# EAGLE board XMICRO-MEMORY (EAGLE 6.3)
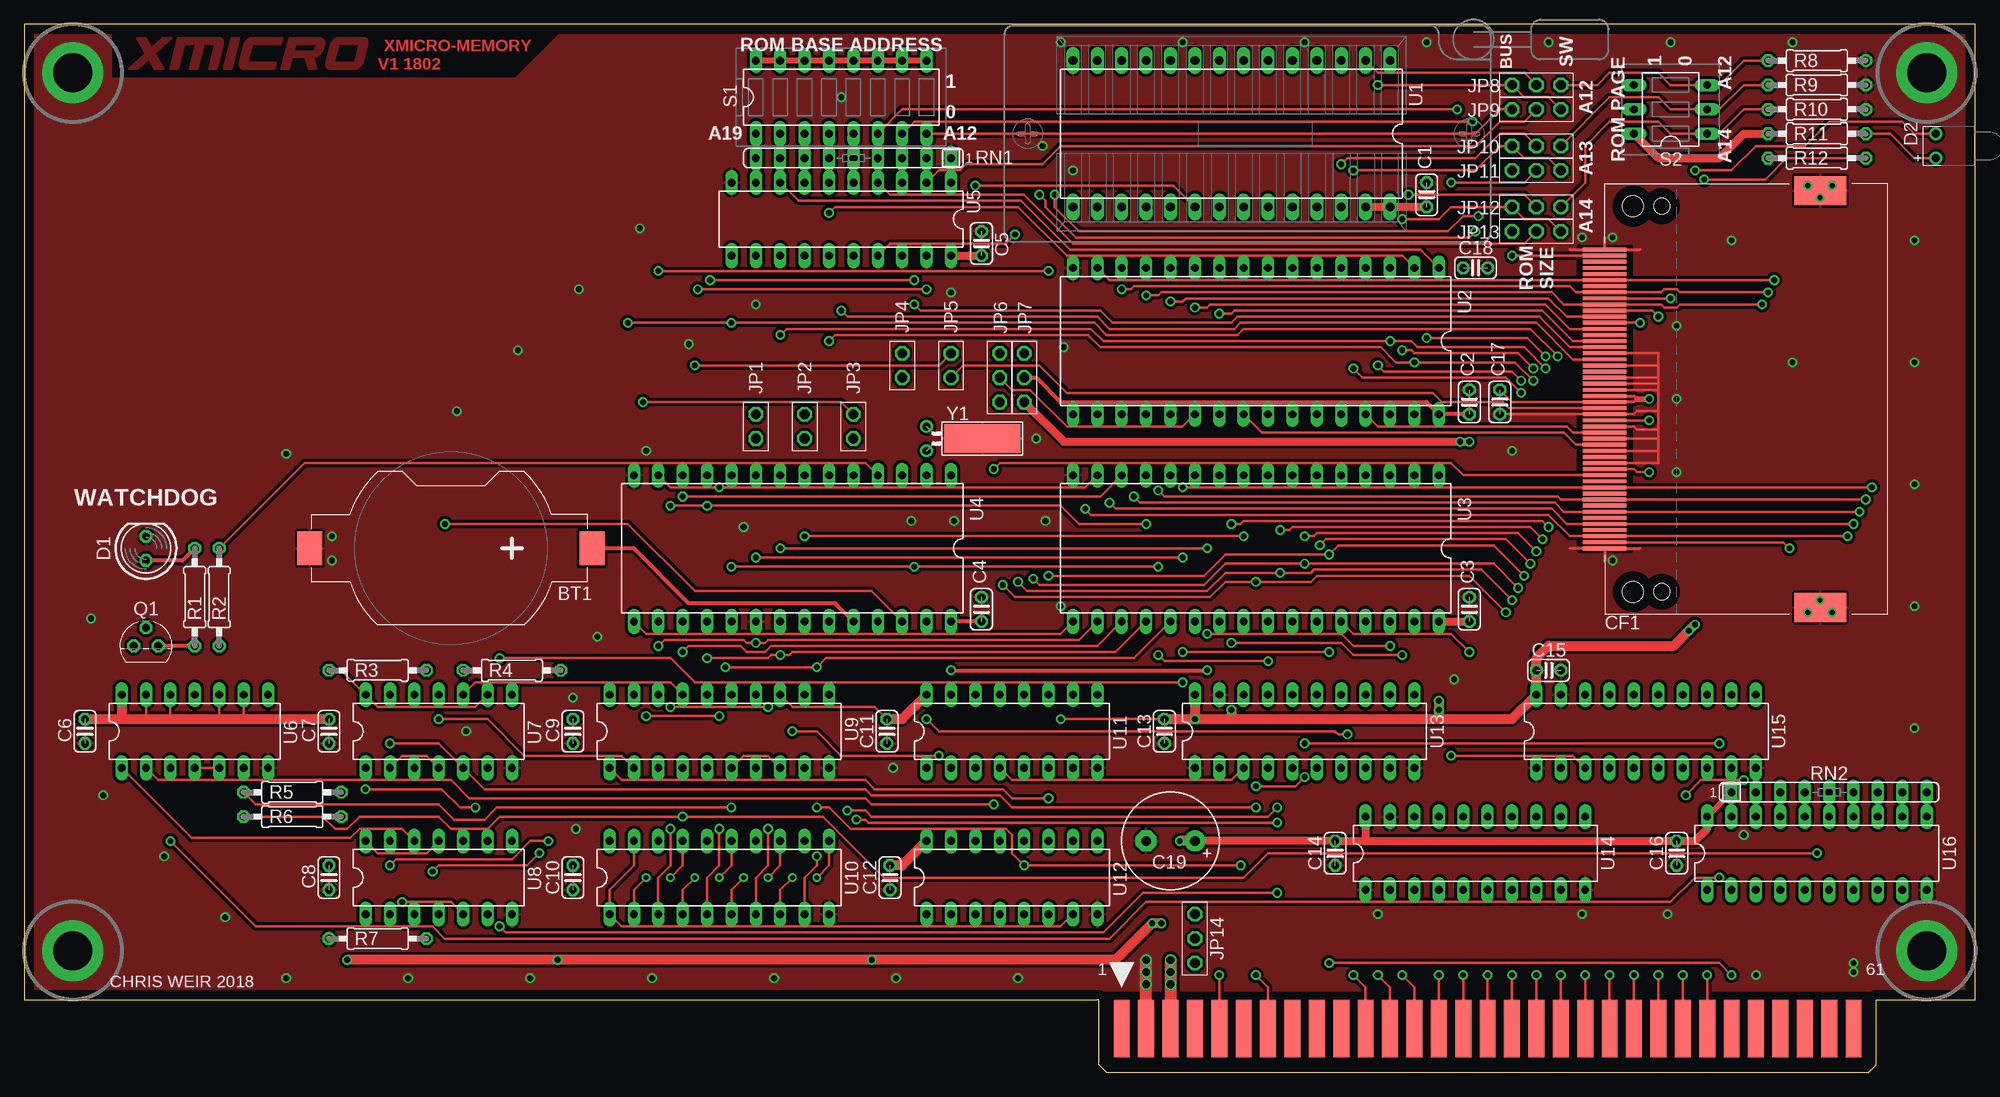
[diagram p0: board, top side]
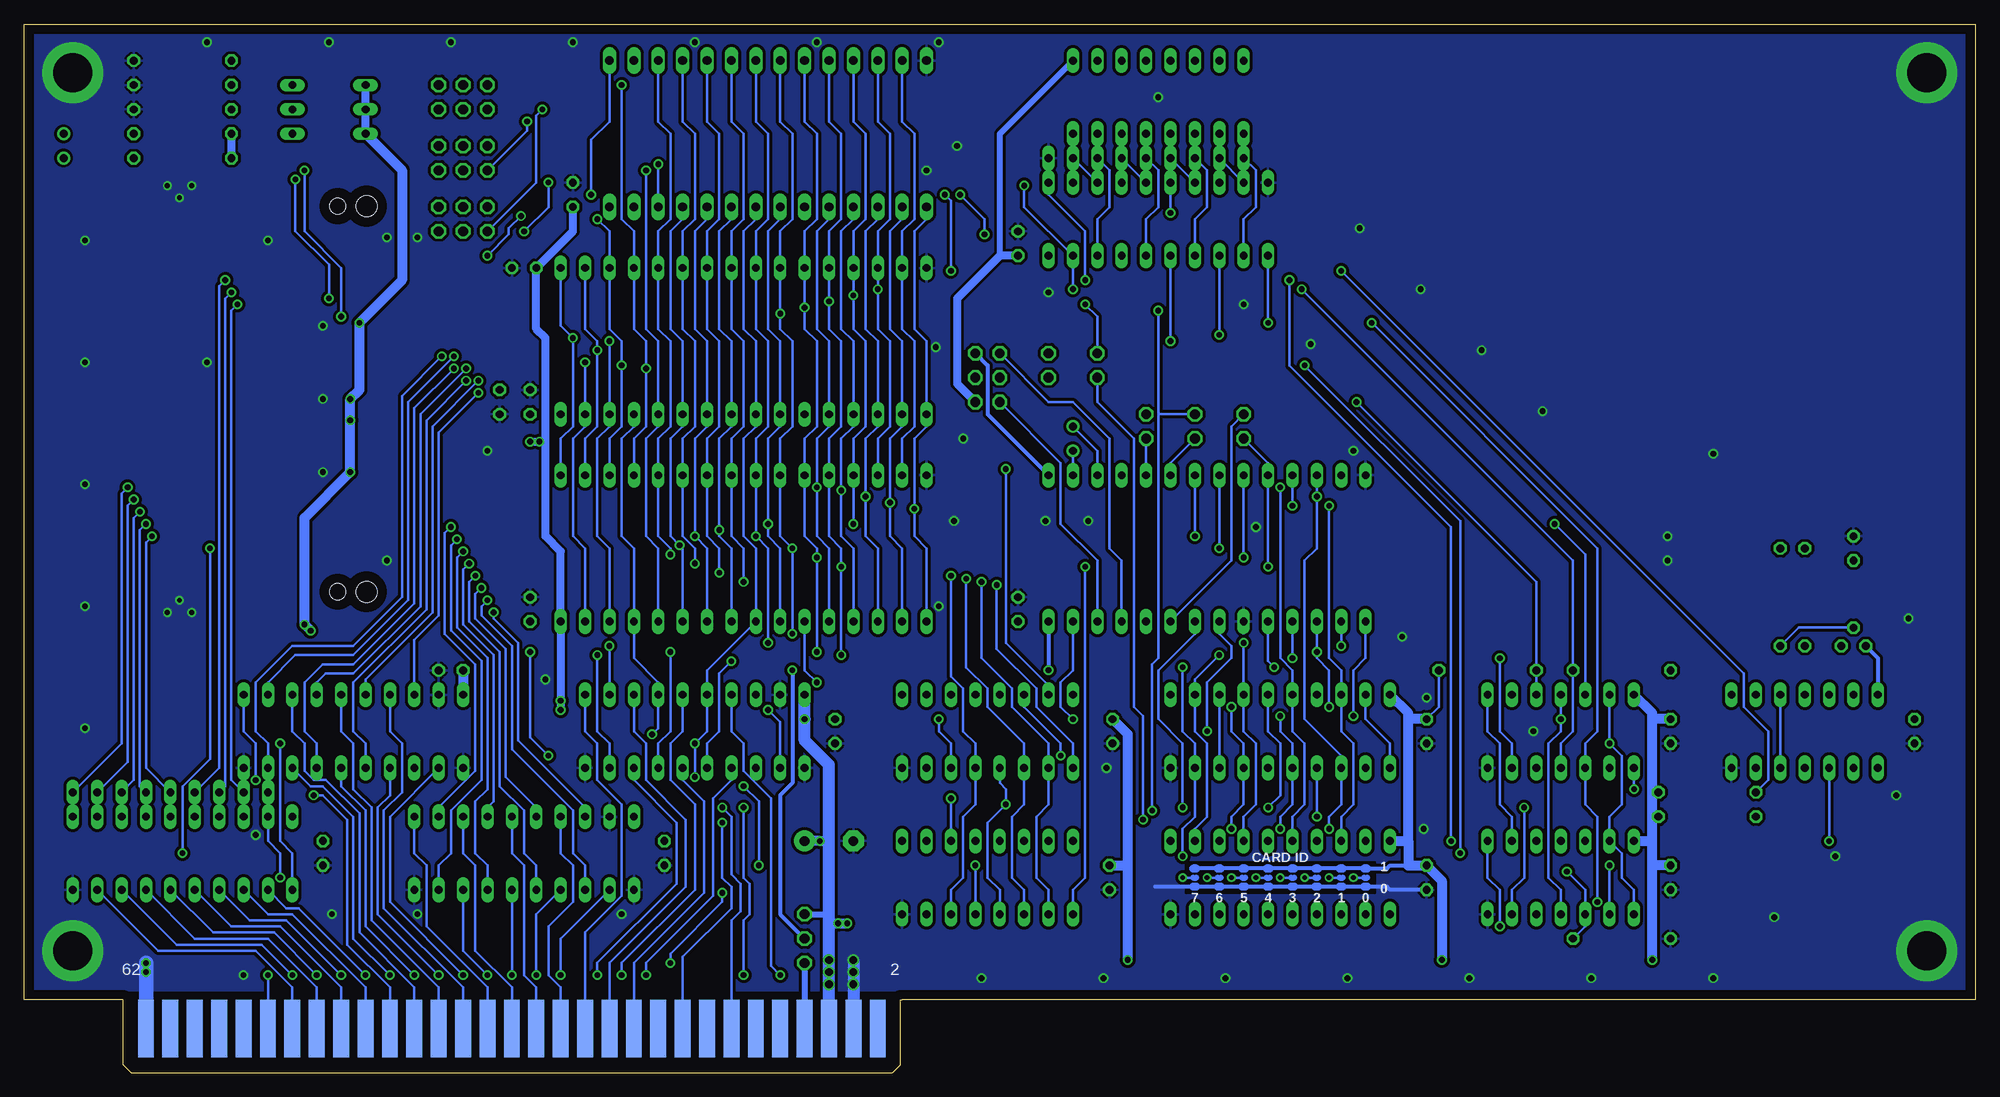
[diagram p1: board, bottom side, seen from below]

Size 203.2 x 109.22 mm. Coordinates in mm from the lower left corner, seen from the top.
Outline: 111.76,7.62 0,7.62 0,109.22 203.2,109.22 203.2,7.62 193.04,7.62
Copper layers (1*16): Top 0.035mm / dielectric 1.5mm / Bottom 0.035mm
Design rules "default *": minimum track width 10mil, minimum drill 0.3mm, track to track 8mil, track to pad 8mil, pad to pad 8mil, via to via 8mil, smd to smd 8mil, copper to edge 40mil, drill to drill 10mil, minimum pad ring 10mil, minimum via ring 8mil, stop-mask expansion 3mil, vias tented up to drill 30mil, thermal gap 10mil
Net classes: 1 GND: width 0.254 mm, clearance 0.305 mm
tRestrict: area 161.9,54.3 to 167.3,86; 2 lines
bRestrict: area 62.5,18.7 to 82.2,21.9

## Footprints (pad centres in the part's own frame; a part is rotated, then mirrored left to right if it is on the bottom)
SMTU2032 = smd 2.6 x 3.5: + -14.7,0; - 14.7,0
C025-024X044 = drill 0.813 octagon: 1 -1.27,0; 2 1.27,0
C-10-5 = drill 1.016 pad 2.184: + -2.54,0 | drill 1.016 pad 2.184 octagon: - 2.54,0
EDGE62M = smd 1.651 x 5.969: 1 -38.1,-3.01; 3 -35.56,-3.01; 5 -33.02,-3.01; 7 -30.48,-3.01; 9 -27.94,-3.01; 11 -25.4,-3.01; 13 -22.86,-3.01; 15 -20.32,-3.01; 17 -17.78,-3.01; 19 -15.24,-3.01; 21 -12.7,-3.01; 23 -10.16,-3.01; 25 -7.62,-3.01; 27 -5.08,-3.01; 29 -2.54,-3.01; 31 0,-3.01; 33 2.54,-3.01; 35 5.08,-3.01; 37 7.62,-3.01; 39 10.16,-3.01; 41 12.7,-3.01; 43 15.24,-3.01; 45 17.78,-3.01; 47 20.32,-3.01; 49 22.86,-3.01; 51 25.4,-3.01; 53 27.94,-3.01; 55 30.48,-3.01; 57 33.02,-3.01; 59 35.56,-3.01; 61 38.1,-3.01 | smd 1.651 x 5.969 bottom: 2 -38.1,-3.01; 4 -35.56,-3.01; 6 -33.02,-3.01; 8 -30.48,-3.01; 10 -27.94,-3.01; 12 -25.4,-3.01; 14 -22.86,-3.01; 16 -20.32,-3.01; 18 -17.78,-3.01; 20 -15.24,-3.01; 22 -12.7,-3.01; 24 -10.16,-3.01; 26 -7.62,-3.01; 28 -5.08,-3.01; 30 -2.54,-3.01; 32 0,-3.01; 34 2.54,-3.01; 36 5.08,-3.01; 38 7.62,-3.01; 40 10.16,-3.01; 42 12.7,-3.01; 44 15.24,-3.01; 46 17.78,-3.01; 48 20.32,-3.01; 50 22.86,-3.01; 52 25.4,-3.01; 54 27.94,-3.01; 56 30.48,-3.01; 58 33.02,-3.01; 60 35.56,-3.01; 62 38.1,-3.01
CF-KYOCERA = smd 0.4 x 4.5: 1 -15.557,7.5; 2 -14.287,7.5; 3 -13.018,7.5; 4 -11.748,7.5; 5 -10.477,7.5; 6 -9.207,7.5; 7 -7.938,7.5; 8 -6.668,7.5; 9 -5.397,7.5; 10 -4.128,7.5; 11 -2.857,7.5; 12 -1.587,7.5; 13 -0.318,7.5; 14 0.953,7.5; 15 2.223,7.5; 16 3.493,7.5; 17 4.763,7.5; 18 6.032,7.5; 19 7.303,7.5; 20 8.572,7.5; 21 9.842,7.5; 22 11.113,7.5; 23 12.383,7.5; 24 13.652,7.5; 25 14.922,7.5; 26 -14.922,7.5; 27 -13.652,7.5; 28 -12.383,7.5; 29 -11.113,7.5; 30 -9.842,7.5; 31 -8.572,7.5; 32 -7.303,7.5; 33 -6.032,7.5; 34 -4.763,7.5; 35 -3.493,7.5; 36 -2.223,7.5; 37 -0.953,7.5; 38 0.318,7.5; 39 1.587,7.5; 40 2.857,7.5; 41 4.128,7.5; 42 5.397,7.5; 43 6.668,7.5; 44 7.938,7.5; 45 9.207,7.5; 46 10.477,7.5; 47 11.748,7.5; 48 13.018,7.5; 49 14.287,7.5; 50 15.557,7.5 | smd 3 x 5.4: P$51 -21.71,-14.95; P$52 21.71,-14.95 | hole 2.2: -20.08,4.55; 20.08,4.55 | hole 1.7: -20.08,1.55; 20.08,1.55
LED5MM = drill 0.813 octagon: A -1.27,0; K 1.27,0
LED-3-R = drill 0.813: A 1.27,0; C -1.27,0
1X02 = drill 1.016 octagon: 1 -1.27,0; 2 1.27,0
1X03 = drill 1.016 octagon: 1 -2.54,0; 2 0,0; 3 2.54,0
TO92 = drill 0.813 octagon: 1 -1.27,0; 2 0,1.905; 3 1.27,0
0207/10 = drill 0.813 octagon: 1 -5.08,0; 2 5.08,0
SIL9 = drill 0.813 long: 1 -10.16,0; 2 -7.62,0; 3 -5.08,0; 4 -2.54,0; 5 0,0; 6 2.54,0; 7 5.08,0; 8 7.62,0; 9 10.16,0
SW-DIP8 = drill 0.813 long: 1 -8.89,-3.81; 2 -6.35,-3.81; 3 -3.81,-3.81; 4 -1.27,-3.81; 5 1.27,-3.81; 6 3.81,-3.81; 7 6.35,-3.81; 8 8.89,-3.81; 9 8.89,3.81; 10 6.35,3.81; 11 3.81,3.81; 12 1.27,3.81; 13 -1.27,3.81; 14 -3.81,3.81; 15 -6.35,3.81; 16 -8.89,3.81
SW-DIP3 = drill 0.813 long: 1 -2.54,-3.81; 2 0,-3.81; 3 2.54,-3.81; 4 2.54,3.81; 5 0,3.81; 6 -2.54,3.81
228-1277-00 = drill 0.9 long: 1 -16.51,-7.62; 2 -13.97,-7.62; 3 -11.43,-7.62; 4 -8.89,-7.62; 5 -6.35,-7.62; 6 -3.81,-7.62; 7 -1.27,-7.62; 8 1.27,-7.62; 9 3.81,-7.62; 10 6.35,-7.62; 11 8.89,-7.62; 12 11.43,-7.62; 13 13.97,-7.62; 14 16.51,-7.62; 15 16.51,7.62; 16 13.97,7.62; 17 11.43,7.62; 18 8.89,7.62; 19 6.35,7.62; 20 3.81,7.62; 21 1.27,7.62; 22 -1.27,7.62; 23 -3.81,7.62; 24 -6.35,7.62; 25 -8.89,7.62; 26 -11.43,7.62; 27 -13.97,7.62; 28 -16.51,7.62
DIL32-6 = drill 0.813 long: 1 -19.05,-7.62; 2 -16.51,-7.62; 3 -13.97,-7.62; 4 -11.43,-7.62; 5 -8.89,-7.62; 6 -6.35,-7.62; 7 -3.81,-7.62; 8 -1.27,-7.62; 9 1.27,-7.62; 10 3.81,-7.62; 11 6.35,-7.62; 12 8.89,-7.62; 13 11.43,-7.62; 14 13.97,-7.62; 15 16.51,-7.62; 16 19.05,-7.62; 17 19.05,7.62; 18 16.51,7.62; 19 13.97,7.62; 20 11.43,7.62; 21 8.89,7.62; 22 6.35,7.62; 23 3.81,7.62; 24 1.27,7.62; 25 -1.27,7.62; 26 -3.81,7.62; 27 -6.35,7.62; 28 -8.89,7.62; 29 -11.43,7.62; 30 -13.97,7.62; 31 -16.51,7.62; 32 -19.05,7.62
DIL28 = drill 0.813 long: 1 -16.51,-7.62; 2 -13.97,-7.62; 3 -11.43,-7.62; 4 -8.89,-7.62; 5 -6.35,-7.62; 6 -3.81,-7.62; 7 -1.27,-7.62; 8 1.27,-7.62; 9 3.81,-7.62; 10 6.35,-7.62; 11 8.89,-7.62; 12 11.43,-7.62; 13 13.97,-7.62; 14 16.51,-7.62; 15 16.51,7.62; 16 13.97,7.62; 17 11.43,7.62; 18 8.89,7.62; 19 6.35,7.62; 20 3.81,7.62; 21 1.27,7.62; 22 -1.27,7.62; 23 -3.81,7.62; 24 -6.35,7.62; 25 -8.89,7.62; 26 -11.43,7.62; 27 -13.97,7.62; 28 -16.51,7.62
DIL20 = drill 0.813 long: 1 -11.43,-3.81; 2 -8.89,-3.81; 3 -6.35,-3.81; 4 -3.81,-3.81; 5 -1.27,-3.81; 6 1.27,-3.81; 7 3.81,-3.81; 8 6.35,-3.81; 9 8.89,-3.81; 10 11.43,-3.81; 11 11.43,3.81; 12 8.89,3.81; 13 6.35,3.81; 14 3.81,3.81; 15 1.27,3.81; 16 -1.27,3.81; 17 -3.81,3.81; 18 -6.35,3.81; 19 -8.89,3.81; 20 -11.43,3.81
DIL14 = drill 0.813 long: 1 -7.62,-3.81; 2 -5.08,-3.81; 3 -2.54,-3.81; 4 0,-3.81; 5 2.54,-3.81; 6 5.08,-3.81; 7 7.62,-3.81; 8 7.62,3.81; 9 5.08,3.81; 10 2.54,3.81; 11 0,3.81; 12 -2.54,3.81; 13 -5.08,3.81; 14 -7.62,3.81
DIL16 = drill 0.813 long: 1 -8.89,-3.81; 2 -6.35,-3.81; 3 -3.81,-3.81; 4 -1.27,-3.81; 5 1.27,-3.81; 6 3.81,-3.81; 7 6.35,-3.81; 8 8.89,-3.81; 9 8.89,3.81; 10 6.35,3.81; 11 3.81,3.81; 12 1.27,3.81; 13 -1.27,3.81; 14 -3.81,3.81; 15 -6.35,3.81; 16 -8.89,3.81
CRYSTAL-3X8H = drill 0.813: 1 -1.27,0; 2 1.27,0 | smd 3 x 8: P$1 0,5.8

## Placement (x,y rotation side)
BT1  CR2032  [SMTU2032]  44.45,54.61 180 top
C1  0.1uF  [C025-024X044]  146.05,91.44 90 top
C2  0.1uF  [C025-024X044]  150.5,69.85 90 top
C3  0.1uF  [C025-024X044]  150.5,48.26 90 top
C4  0.1uF  [C025-024X044]  99.69,48.26 90 top
C5  0.1uF  [C025-024X044]  99.69,86.36 90 top
C6  0.1uF  [C025-024X044]  6.35,35.56 270 top
C7  0.1uF  [C025-024X044]  31.75,35.56 270 top
C8  0.1uF  [C025-024X044]  31.75,20.32 270 top
C9  0.1uF  [C025-024X044]  57.15,35.56 270 top
C10  0.1uF  [C025-024X044]  57.15,20.32 270 top
C11  0.1uF  [C025-024X044]  89.85,35.56 270 top
C12  0.1uF  [C025-024X044]  90.17,20.32 270 top
C13  0.1uF  [C025-024X044]  118.75,35.56 270 top
C14  0.1uF  [C025-024X044]  136.53,22.86 270 top
C15  0.1uF  [C025-024X044]  158.75,41.91 0 top
C16  0.1uF  [C025-024X044]  172.09,22.86 270 top
C17  0.1uF  [C025-024X044]  153.67,69.85 270 top
C18  0.1uF  [C025-024X044]  151.13,83.82 0 top
C19  220uF 10V  [C-10-5]  119.38,24.13 180 top
CE0  XMICRO-BUS-EDGE62M  [EDGE62M]  152.4,7.62 0 top
CF1  CF-IDE  [CF-KYOCERA]  172.09,70.17 90 top
D1  RED  [LED5MM]  12.7,54.61 90 top
D2  GREEN  [LED-3-R]  199.07,96.52 270 top
JP1  PINHD-1X2THRU  [1X02]  76.2,67.31 90 top
JP2  PINHD-1X2THRU  [1X02]  81.28,67.31 90 top
JP3  PINHD-1X2THRU  [1X02]  86.36,67.31 90 top
JP4  PINHD-1X2THRU  [1X02]  91.44,73.66 90 top
JP5  PINHD-1X2THRU  [1X02]  96.52,73.66 90 top
JP6  PINHD1X3THRU  [1X03]  101.6,72.39 90 top
JP7  PINHD1X3THRU  [1X03]  104.14,72.39 90 top
JP8  PINHD1X3THRU  [1X03]  157.48,102.87 180 top
JP9  PINHD1X3THRU  [1X03]  157.48,100.33 180 top
JP10  PINHD1X3THRU  [1X03]  157.48,96.52 180 top
JP11  PINHD1X3THRU  [1X03]  157.48,93.98 180 top
JP12  PINHD1X3THRU  [1X03]  157.48,90.17 180 top
JP13  PINHD1X3THRU  [1X03]  157.48,87.63 180 top
JP14  PINHD1X3THRU  [1X03]  121.92,13.97 90 top
Q1  2N4403  [TO92]  12.7,44.45 0 top
R1  270  [0207/10]  17.78,49.53 270 top
R2  22k  [0207/10]  20.32,49.53 270 top
R3  10k  [0207/10]  36.83,41.91 0 top
R4  10k  [0207/10]  50.8,41.91 0 top
R5  10k  [0207/10]  27.94,29.21 180 top
R6  10k  [0207/10]  27.94,26.67 180 top
R7  10k  [0207/10]  36.83,13.97 0 top
R8  10k  [0207/10]  186.69,105.41 180 top
R9  10k  [0207/10]  186.69,102.87 180 top
R10  10k  [0207/10]  186.69,100.33 180 top
R11  270  [0207/10]  186.69,97.79 180 top
R12  10k  [0207/10]  186.69,95.25 180 top
RN1  10k  [SIL9]  86.36,95.25 180 top
RN2  10k  [SIL9]  187.96,29.21 0 top
S1  SW-DIP08  [SW-DIP8]  85.09,101.6 0 top
S2  SW-DIP03  [SW-DIP3]  171.45,100.33 90 top
U1  28C256  [228-1277-00]  125.73,97.79 180 top
U2  AS6C4008  [DIL32-6]  128.27,76.2 180 top
U3  AS6C4008  [DIL32-6]  128.27,54.61 180 top
U4  BQ4845  [DIL28]  80.01,54.61 180 top
U5  74688  [DIL20]  85.09,88.9 180 top
U6  7408  [DIL14]  17.78,35.56 0 top
U7  7410  [DIL14]  43.18,35.56 0 top
U8  7404  [DIL14]  43.18,20.32 0 top
U9  74244  [DIL20]  72.39,35.56 0 top
U10  74244  [DIL20]  72.39,20.32 0 top
U11  74138  [DIL16]  102.87,35.56 0 top
U12  74138  [DIL16]  102.87,20.32 0 top
U13  74244  [DIL20]  133.35,35.56 0 top
U14  74244  [DIL20]  151.13,22.86 0 top
U15  74244  [DIL20]  168.91,35.56 0 top
U16  74245  [DIL20]  186.69,22.86 0 top
Y1  32.768kHz  [CRYSTAL-3X8H]  93.98,66.04 270 top

## Library data of the parts
BT1 C19 CE0 CF1 D2 JP1-JP14 Q1 S1 S2 U1-U4 Y1 = Custom
C1-C18 R1-R12 = resistor
D1 = led
RN1 RN2 = resistor-sil; OC_FARNELL: unknown; OC_NEWARK: unknown
U5-U16 = 74xx-us

## Nets
!BCSX: CE0.9 U13.17
!BRD: CE0.21 U13.4
!BWR: CE0.22 U13.6
!CESB!IN: JP6.1 U4.26 U7.12
!CESB!OUT: JP6.3 U4.25
!CF_CD1: CF1.26 R6.2 U9.4
!CF_CD2: CF1.25 R5.2 U9.15
!CINH: CE0.13 U7.5 U7.13 U8.1 U8.13
!CS_CF: CF1.7 U11.15
!CS_ID: U10.1 U10.19 U12.7
!CS_RTC: U4.21 U11.14
!CS_SR: U9.1 U9.19 U12.11
!CSX: U6.2 U11.4 U12.4 U13.3
!INT_RTC: JP3.1 U4.5
!IRQX: CE0.52 U8.8
!RD: CF1.34 U1.22 U2.24 U3.24 U4.22 U12.5 U13.16 U16.1
!RST: CE0.14 CF1.41 JP2.2
!SR_CF: U7.11 U8.4 U9.2
!SR_RTC: JP3.2 R4.1 U7.10 U9.17
!U1CS: JP6.2 U2.22
!U2CS: U3.22 U7.6
!U3CS: R3.2 U1.20 U5.19 U7.2 U7.4
!WAIT: CE0.18 JP4.1
!WR: CF1.35 U2.29 U3.29 U4.27 U13.14
+5VSB: CE0.8 JP14.1
A0: CF1.20 JP1.1 U1.10 U2.12 U3.12 U4.10 U12.1 U13.5
A1: CF1.19 U1.9 U2.11 U3.11 U4.9 U13.7
A2: CF1.18 U1.8 U2.10 U3.10 U4.8 U13.12
A3: U1.7 U2.9 U3.9 U4.7 U13.9
A4: U1.6 U2.8 U3.8 U11.1 U14.18
A5: U1.5 U2.7 U3.7 U11.2 U12.2 U14.3
A6: U1.4 U2.6 U3.6 U11.3 U12.3 U14.16
A7: U1.3 U2.5 U3.5 U11.5 U12.6 U14.5
A8: U1.25 U2.27 U3.27 U14.14
A9: U1.24 U2.26 U3.26 U14.7
A10: U1.21 U2.23 U3.23 U14.12
A11: U1.23 U2.25 U3.25 U14.9
A12: JP8.3 JP9.1 U2.4 U3.4 U15.18
A13: JP10.3 JP11.1 U2.28 U3.28 U15.3
A14: JP12.3 JP13.1 U2.3 U3.3 U15.16
A15: U2.31 U3.31 U5.15 U15.5
A16: U2.2 U3.2 U5.6 U15.14
A17: U2.30 U3.30 U5.13 U15.7
A18: U2.1 U3.1 U5.8 U15.12
A19: U5.11 U7.3 U8.5 U15.9
BA0: CE0.23 U13.15
BA1: CE0.24 U13.13
BA2: CE0.25 U13.8
BA3: CE0.26 U13.11
BA4: CE0.27 U14.2
BA5: CE0.28 U14.17
BA6: CE0.29 U14.4
BA7: CE0.30 U14.15
BA8: CE0.31 U14.6
BA9: CE0.32 U14.13
BA10: CE0.33 U14.8
BA11: CE0.34 U14.11
BA12: CE0.35 U15.2
BA13: CE0.36 U15.17
BA14: CE0.37 U15.4
BA15: CE0.38 U15.15
BA16: CE0.39 U15.6
BA17: CE0.40 U15.13
BA18: CE0.41 U15.8
BA19: CE0.42 U15.11
D0: CF1.21 RN2.2 U1.11 U2.13 U3.13 U4.11 U9.18 U10.18 U16.18
D1: CF1.22 RN2.3 U1.12 U2.14 U3.14 U4.12 U9.3 U10.3 U16.17
D2: CF1.23 RN2.4 U1.13 U2.15 U3.15 U4.13 U9.16 U10.16 U16.16
D3: CF1.2 RN2.5 U1.15 U2.17 U3.17 U4.15 U9.5 U10.5 U16.15
D4: CF1.3 RN2.6 U1.16 U2.18 U3.18 U4.16 U9.14 U10.14 U16.14
D5: CF1.4 RN2.7 U1.17 U2.19 U3.19 U4.17 U9.7 U10.7 U16.13
D6: CF1.5 RN2.8 U1.18 U2.20 U3.20 U4.18 U9.12 U10.12 U16.12
D7: CF1.6 RN2.9 U1.19 U2.21 U3.21 U4.19 U9.9 U10.9 U16.11
GND [GND]: BT1.- C1.2 C2.2 C3.2 C4.2 C5.2 C6.2 C7.2 C8.2 C9.2 C10.2 C11.2 C12.2 C13.2 C14.2 C15.2 C16.2 C17.2 C18.2 C19.- CE0.3 CE0.4 CE0.62 CF1.1 CF1.8 CF1.9 CF1.10 CF1.11 CF1.12 CF1.14 CF1.15 CF1.16 CF1.17 CF1.39 CF1.50 CF1.P$51 CF1.P$52 D1.K R7.1 R8.1 R9.1 R10.1 RN1.1 U1.14 U2.16 U3.16 U4.14 U4.20 U5.10 U6.7 U7.7 U8.7 U9.10 U10.10 U11.8 U12.8 U13.1 U13.10 U13.19 U14.1 U14.10 U14.19 U15.1 U15.10 U15.19 U16.10 Y1.P$1
ID0: U10.2
ID1: U10.17
ID2: U10.4
ID3: U10.15
ID4: U10.6
ID5: U10.13
ID6: U10.8
ID7: U10.11
INT_CF: CF1.37 JP5.1
N$1: CF1.45 D2.C
N$2: D2.A R11.1
N$3: CF1.42 JP4.2
N$4: U5.1 U8.2
N$5: U4.3 Y1.1
N$6: U4.2 Y1.2
N$7: BT1.+ U4.24
N$8: Q1.2 R2.2
N$9: C2.1 JP7.2 U2.32
N$10: Q1.3 R1.2
N$11: JP1.2 U4.23
N$12: JP10.2 U1.26
N$13: D1.A R1.1
N$14: R2.1 U4.4
N$16: JP8.2 U1.2
N$17: JP12.2 U1.1
N$18: JP13.2 U5.4
N$19: U7.8 U8.9
N$20: U6.1 U8.12
N$21: JP5.2 R7.2 U8.3
N$22: JP11.2 U5.17
N$23: JP9.2 U5.2
N$24: C4.1 JP14.2 U4.28
N$25: CF1.46 R12.1
N$27: U7.1 U8.6
N$31: JP2.1 U4.6
N$32: U6.3 U16.19
N$33: CE0.50 U16.9
N$34: CE0.49 U16.8
N$35: CE0.48 U16.7
N$36: CE0.47 U16.6
N$37: CE0.46 U16.5
N$38: CE0.45 U16.4
N$39: CE0.44 U16.3
N$40: CE0.43 U16.2
N$108: JP8.1 R8.2 S2.3
N$109: JP10.1 R9.2 S2.2
N$110: JP12.1 R10.2 S2.1
SW12: JP9.3 RN1.2 S1.8 U5.3
SW13: JP11.3 RN1.3 S1.7 U5.18
SW14: JP13.3 RN1.4 S1.6 U5.5
SW15: RN1.5 S1.5 U5.16
SW16: RN1.6 S1.4 U5.7
SW17: RN1.7 S1.3 U5.14
SW18: RN1.8 S1.2 U5.9
SW19: RN1.9 S1.1 U5.12
VBAT: JP7.3 U4.1
VCC: C1.1 C3.1 C5.1 C6.1 C7.1 C8.1 C9.1 C10.1 C11.1 C12.1 C13.1 C14.1 C15.1 C16.1 C17.1 C18.1 C19.+ CE0.5 CE0.6 CF1.13 CF1.32 CF1.36 CF1.38 CF1.44 JP7.1 JP14.3 Q1.1 R3.1 R4.2 R5.1 R6.1 R11.2 R12.2 RN2.1 S1.9 S1.10 S1.11 S1.12 S1.13 S1.14 S1.15 S1.16 S2.4 S2.5 S2.6 U1.27 U1.28 U3.32 U5.20 U6.4 U6.5 U6.9 U6.10 U6.12 U6.13 U6.14 U7.9 U7.14 U8.11 U8.14 U9.6 U9.8 U9.11 U9.13 U9.20 U10.20 U11.6 U11.16 U12.16 U13.2 U13.20 U14.20 U15.20 U16.20

## Tracks (layer width: path | path; a pad name or v marks a point on that pad's centre or on a via)
!BCSX  (via drill 0.6)
  Top 0.254: CE0.9 v124.46,10.16
  Bottom 0.254: v124.46,10.16 125.41,11.11 125.41,28.57 128.27,31.43 128.27,34.29 129.54,35.56 U13.17
!BRD  (via drill 0.6)
  Top 0.254: CE0.21 139.7,8.89 v138.43,10.16
  Bottom 0.254: v138.43,10.16 138.43,11.43 131.44,18.41 131.44,28.57 129.54,30.48 U13.4
!BWR
  Bottom 0.254: CE0.22 139.7,11.43 132.4,18.73 132.4,28.26 134.62,30.48 U13.6
!CESB!IN  (via drill 0.6)
  Top 0.254: v43.81,57.15 62.87,57.15 69.85,50.16 88.27,50.16 U4.26
  Bottom 0.254: JP6.1 95.25,63.5 95.25,57.15 91.44,53.34 U4.26 | U7.12 40.64,53.97 v43.81,57.15
!CESB!OUT
  Bottom 0.254: U4.25 88.9,53.34 90.17,54.61 90.17,66.04 93.98,69.85 96.52,69.85 JP6.3
!CF_CD1  (via drill 0.6)
  Top 0.254: CF1.26 183.2,55.24 v183.83,54.61 | v186.69,22.86 129.54,22.86 127,20.32 89.53,20.32 83.19,26.67 v68.58,26.67 49.53,26.67 48.26,25.4 44.45,25.4 43.18,26.67 34.92,26.67 33.66,25.4 32.38,25.4 31.11,26.67 R6.2
  Bottom 0.254: v183.83,54.61 183.83,32.7 186.69,29.85 v186.69,22.86 | U9.4 v68.58,26.67
!CF_CD2  (via drill 0.6)
  Top 0.254: CF1.25 v154.94,85.09 | v151.45,89.22 149.86,89.22 148.27,87.63 109.86,87.63 107.31,90.17 v107.31,91.44 | v106.68,83.5 v66.04,83.5 | v73.66,27.62 49.21,27.62 47.94,26.35 44.77,26.35 43.18,27.94 24.13,27.94 R5.2
  Bottom 0.254: v154.94,85.09 152.72,87.31 152.72,87.95 v151.45,89.22 | v107.31,91.44 106.68,90.81 v106.68,83.5 | v66.04,83.5 24.13,41.59 24.13,38.1 21.59,35.56 21.59,30.48 R5.2 | U9.15 73.66,35.56 72.39,34.29 72.39,28.89 v73.66,27.62
!CINH  (via drill 0.6)
  Top 0.254: v128.27,27.62 102.87,27.62 101.6,28.89 88.27,28.89 87.63,29.53 47.94,29.53 U7.5 43.18,34.29 v38.1,34.29 | v128.27,10.16 129.54,8.89 CE0.13
  Bottom 0.254: v128.27,27.62 128.27,20.32 127.64,19.68 127.64,16.51 128.27,15.88 v128.27,10.16 | U7.13 v38.1,34.29 36.83,33.02 36.83,27.94 38.1,26.67 U8.13 36.83,22.86 36.83,20.32 35.56,19.05 U8.1
!CS_CF  (via drill 0.6)
  Top 0.254: CF1.7 149.86,62.23 148.59,63.5 101.6,63.5 v100.97,62.86
  Bottom 0.254: U11.15 96.52,40.32 100.97,44.77 v100.97,62.86
!CS_ID
  Top 0.254: U10.19 63.5,21.59 60.96,19.05 U10.1 62.23,15.24 107.95,15.24 U12.7
!CS_RTC  (via drill 0.6)
  Top 0.254: v95.25,33.02 85.09,33.02 82.55,35.56 v80.01,35.56
  Bottom 0.254: U11.14 99.06,38.1 95.25,34.29 v95.25,33.02 | v80.01,35.56 80.01,40.64 77.47,43.18 77.47,44.45 78.74,45.72 U4.21
!CS_SR  (via drill 0.6)
  Top 0.254: U9.1 62.23,30.48 87.63,30.48 88.58,29.53 101.92,29.53 102.87,28.57 v106.68,28.57
  Bottom 0.254: U9.1 60.96,34.29 63.5,36.83 U9.19 | v106.68,28.57 U12.11
!CSX  (via drill 0.6)
  Top 0.254: U13.3 125.73,30.48 102.87,30.48 U11.4 | v100.97,27.94 88.27,27.94 87.63,28.57 46.35,28.57 44.45,30.48 13.97,30.48 U6.2
  Bottom 0.254: U12.4 101.6,19.05 102.87,20.32 102.87,26.04 v100.97,27.94 100.97,29.53 101.6,30.16 U11.4
!INT_RTC
  Bottom 0.254: U4.5 JP3.1
!IRQX  (via drill 0.6)
  Top 0.254: v177.8,10.16 176.53,11.43 v135.89,11.43 | v130.49,18.73 116.52,18.73 112.39,14.61 50.16,14.61 v49.53,15.24
  Bottom 0.254: CE0.52 v177.8,10.16 | v135.89,11.43 135.89,12.38 130.49,17.78 v130.49,18.73 | v49.53,15.24 49.53,19.05 50.8,20.32 U8.8
!RD  (via drill 0.6)
  Top 0.254: CF1.34 161.61,65.41 160.34,66.67 128.91,66.67 U2.24 | v133.35,34.29 v176.53,34.29 | v133.35,30.8 132.4,29.85 v128.27,29.85 | v126.68,21.59 v104.14,21.59 102.87,22.86 102.87,24.77 102.23,25.4 86.04,25.4 83.82,27.62 v82.55,27.62
  Bottom 0.254: U1.22 127,88.9 128.27,87.63 128.27,77.47 127,76.2 U2.24 127,67.31 128.27,66.04 128.27,55.88 127,54.61 U3.24 132.08,41.91 U13.16 132.08,35.56 v133.35,34.29 v133.35,30.8 | v176.53,34.29 176.53,24.13 175.26,22.86 U16.1 | U12.5 v104.14,21.59 | v126.68,21.59 126.68,28.26 v128.27,29.85 | v82.55,27.62 82.55,34.29 85.09,36.83 85.09,41.91 81.28,45.72 U4.22
!RST  (via drill 0.6)
  Top 0.254: CF1.41 161.29,74.3 157.48,78.11 126.68,78.11 126.05,77.47 113.03,77.47 111.76,78.74 85.72,78.74 v85.09,79.38 | v85.72,27.3 87.63,27.3 88.27,26.67 129.54,26.67 v130.49,27.62
  Bottom 0.254: v85.09,79.38 85.09,68.58 | 85.09,68.58 85.09,43.18 85.72,42.54 v85.72,27.3 | CE0.14 129.54,15.88 128.59,16.83 128.59,19.68 129.54,20.64 129.54,26.67 v130.49,27.62 | JP2.2 85.09,68.58
!SR_CF  (via drill 0.6)
  Top 0.254: U9.2 62.23,33.02 52.07,33.02 48.26,36.83 v43.18,36.83
  Bottom 0.254: U7.11 v43.18,36.83 43.18,35.56 44.45,34.29 44.45,20.32 43.18,19.05 U8.4
!SR_RTC  (via drill 0.6)
  Top 0.254: v64.45,69.85 85.09,69.85 JP3.2 | U9.17 67.31,40.64 46.99,40.64 U7.10
  Bottom 0.254: U7.10 R4.1 45.72,51.12 v64.45,69.85
!U1CS
  Top 0.254: U2.22 120.65,67.31 108.58,67.31 104.78,71.12 102.87,71.12 JP6.2
!U2CS  (via drill 0.6)
  Top 0.254: v120.65,40.64 69.85,40.64 67.31,43.18 v49.53,43.18
  Bottom 0.254: U3.22 121.92,41.91 v120.65,40.64 | v49.53,43.18 49.53,35.56 48.26,34.29 U7.6
!U3CS  (via drill 0.6)
  Top 0.254: v99.06,92.39 119.7,92.39 U1.20 | U7.2 39.37,33.02 41.91,33.02 U7.4 | v70.17,81.6 v93.98,81.6
  Bottom 0.254: v99.06,92.39 99.06,90.17 U5.19 v93.98,81.6 | U7.4 43.18,34.29 41.91,35.56 R3.2 41.91,53.34 v70.17,81.6
!WAIT  (via drill 0.6)
  Top 0.254: v130.49,26.04 87.95,26.04 87.63,26.35 v86.68,26.35
  Bottom 0.254: CE0.18 134.62,12.07 129.54,17.14 129.54,19.37 130.49,20.32 v130.49,26.04 | v86.68,26.35 86.68,37.15 87.63,38.1 87.63,66.04 91.44,69.85 JP4.1
!WR  (via drill 0.6)
  Top 0.254: CF1.35 161.29,66.67 160.66,67.31 140.97,67.31 U2.29 | v93.98,36.83 95.25,35.56 136.53,35.56 136.84,35.24 v137.79,35.24
  Bottom 0.254: U2.29 139.7,67.31 140.97,66.04 140.97,55.88 139.7,54.61 U3.29 139.7,43.18 137.16,40.64 U13.14 137.16,35.88 v137.79,35.24 | U4.27 93.98,41.91 95.25,40.64 95.25,38.1 v93.98,36.83
+5VSB
  Bottom 0.61: JP14.1 CE0.8
A0  (via drill 0.6)
  Top 0.254: CF1.20 160.66,78.74 158.75,80.65 120.97,80.65 120.65,80.33 v119.38,80.33 | v118.11,43.5 118.75,42.86 v129.54,42.86 | v73.66,52.7 v92.71,52.7 v118.11,52.7
  Bottom 0.254: U1.10 119.38,99.06 118.11,97.79 118.11,88.9 119.38,87.63 U2.12 v119.38,80.33 119.38,77.47 118.11,76.2 118.11,67.31 119.38,66.04 U3.12 119.38,55.88 118.11,54.61 v118.11,52.7 v118.11,43.5 | U13.5 132.08,34.29 130.81,35.56 130.81,41.59 v129.54,42.86 | v73.66,52.7 U4.10 73.66,63.5 JP1.1 | U12.1 93.98,19.05 92.71,20.32 v92.71,52.7
A1  (via drill 0.6)
  Top 0.254: CF1.19 160.97,77.47 158.43,80.01 123.51,80.01 123.19,79.69 v121.92,79.69 | v135.89,43.81 v120.65,43.81 | v76.2,53.66 v120.65,53.66
  Bottom 0.254: U1.9 121.92,99.06 120.65,97.79 120.65,88.9 121.92,87.63 U2.11 v121.92,79.69 121.92,77.47 120.65,76.2 120.65,67.31 121.92,66.04 U3.11 121.92,55.88 120.65,54.61 v120.65,53.66 v120.65,43.81 | U13.7 137.16,34.29 135.89,35.56 v135.89,43.81 | U4.9 v76.2,53.66
A2  (via drill 0.6)
  Top 0.254: CF1.18 161.29,76.2 158.12,79.38 126.05,79.38 125.73,79.06 v124.46,79.06 | v142.24,44.45 138.43,44.45 137.16,45.72 v123.19,45.72 | v78.74,54.61 v123.19,54.61
  Bottom 0.254: U1.8 124.46,99.06 123.19,97.79 123.19,88.9 124.46,87.63 U2.10 v124.46,79.06 124.46,77.47 123.19,76.2 123.19,67.31 124.46,66.04 U3.10 124.46,55.88 v123.19,54.61 v123.19,45.72 | U13.12 v142.24,44.45 | U4.8 v78.74,54.61
A3  (via drill 0.6)
  Top 0.254: v125.73,44.77 137.16,44.77 138.43,43.5 v143.51,43.5 | v81.28,55.88 v127,55.88
  Bottom 0.254: U1.7 127,99.06 125.73,97.79 125.73,88.9 127,87.63 U2.9 127,77.47 125.73,76.2 125.73,67.31 127,66.04 U3.9 v127,55.88 125.73,54.61 v125.73,44.77 | v143.51,43.5 143.51,35.56 142.24,34.29 U13.9 | U4.7 v81.28,55.88
A4  (via drill 0.6)
  Top 0.254: v154.31,47.94 150.5,51.75 134.62,51.75 133.99,51.12 v128.27,51.12 125.09,51.12 123.51,49.53 103.19,49.53 v101.92,50.8
  Bottom 0.254: U1.6 129.54,99.06 128.27,97.79 128.27,88.9 129.54,87.63 U2.8 129.54,77.47 128.27,76.2 128.27,67.31 129.54,66.04 U3.8 129.54,55.88 128.27,54.61 v128.27,51.12 | U14.18 144.78,27.62 151.76,34.61 151.76,44.77 154.31,47.31 v154.31,47.94 | U11.1 93.98,34.29 97.79,38.1 97.79,40 101.92,44.13 v101.92,50.8
A5  (via drill 0.6)
  Top 0.254: v154.94,49.21 151.76,52.39 134.3,52.39 133.99,52.07 v130.81,52.07 125.09,52.07 123.19,50.16 104.46,50.16 v103.5,51.12
  Bottom 0.254: U1.5 132.08,99.06 130.81,97.79 130.81,88.9 132.08,87.63 U2.7 132.08,77.47 130.81,76.2 130.81,67.31 132.08,66.04 U3.7 132.08,55.88 130.81,54.61 v130.81,52.07 | U14.3 144.78,21.59 146.05,22.86 146.05,27.3 152.4,33.66 152.4,44.45 155.57,47.62 155.57,48.58 v154.94,49.21 | v103.5,51.12 103.5,43.18 100.33,40 100.33,38.1 96.52,34.29 U11.2 96.52,27.94 97.79,26.67 97.79,20.32 96.52,19.05 U12.2
A6  (via drill 0.6)
  Top 0.254: v155.57,50.48 153.03,53.02 v133.35,53.02 125.09,53.02 122.87,50.8 105.73,50.8 v105.09,51.43
  Bottom 0.254: U1.4 134.62,99.06 133.35,97.79 133.35,88.9 134.62,87.63 U2.6 134.62,77.47 133.35,76.2 133.35,67.31 134.62,66.04 U3.6 134.62,55.88 133.35,54.61 v133.35,53.02 | U14.16 149.86,27.62 153.03,30.8 153.03,44.13 156.21,47.31 156.21,49.85 v155.57,50.48 | v105.09,51.43 105.09,42.23 102.87,40 102.87,38.1 99.06,34.29 U11.3 99.06,27.94 100.33,26.67 100.33,20.32 99.06,19.05 U12.3
A7  (via drill 0.6)
  Top 0.254: v156.21,51.75 153.03,54.93 136.84,54.93 v135.89,53.97 125.09,53.97 122.87,51.75 v106.68,51.75
  Bottom 0.254: U1.3 137.16,99.06 135.89,97.79 135.89,88.9 137.16,87.63 U2.5 137.16,77.47 135.89,76.2 135.89,67.31 137.16,66.04 U3.5 137.16,55.88 135.89,54.61 v135.89,53.97 | U14.5 149.86,21.59 151.13,22.86 151.13,27.3 153.67,29.85 153.67,43.81 156.84,46.99 156.84,51.12 v156.21,51.75 | v106.68,51.75 106.68,41.27 105.41,40 105.41,35.56 104.14,34.29 U11.5 104.14,27.94 105.41,26.67 105.41,20.32 106.68,19.05 U12.6
A8  (via drill 0.6)
  Top 0.254: v156.84,53.02 154.31,55.56 135.57,55.56 v134.94,54.93
  Bottom 0.254: U3.27 134.62,54.61 v134.94,54.93 135.89,55.88 135.89,66.04 134.62,67.31 U2.27 134.62,76.2 135.89,77.47 135.89,87.63 134.62,88.9 U1.25 | U14.14 154.94,27.62 154.31,28.26 154.31,43.5 157.48,46.67 157.48,52.39 v156.84,53.02
A9  (via drill 0.6)
  Top 0.254: v157.48,54.29 155.57,56.2 134.62,56.2 134.3,55.88 v133.35,55.88
  Bottom 0.254: U3.26 132.08,54.61 v133.35,55.88 133.35,66.04 132.08,67.31 U2.26 132.08,76.2 133.35,77.47 133.35,87.63 132.08,88.9 U1.24 | U14.7 154.94,21.59 156.21,22.86 156.21,28.26 154.94,29.53 154.94,43.18 158.12,46.35 158.12,53.66 v157.48,54.29
A10  (via drill 0.6)
  Top 0.254: v158.75,56.83 158.12,57.47 127,57.47 126.68,57.15 v125.73,57.15
  Bottom 0.254: U3.23 124.46,54.61 125.73,55.88 v125.73,57.15 125.73,66.04 124.46,67.31 U2.23 124.46,76.2 125.73,77.47 125.73,87.63 124.46,88.9 U1.21 | U14.12 160.02,27.62 156.21,31.43 156.21,42.54 159.38,45.72 159.38,56.2 v158.75,56.83
A11  (via drill 0.6)
  Top 0.254: v158.12,55.56 156.84,56.83 132.08,56.83 131.76,56.52 v130.81,56.52
  Bottom 0.254: U3.25 129.54,54.61 130.81,55.88 v130.81,56.52 130.81,66.04 129.54,67.31 U2.25 129.54,76.2 130.81,77.47 130.81,87.63 129.54,88.9 U1.23 | U14.9 160.02,21.59 158.75,22.86 158.75,27.3 155.57,30.48 155.57,42.86 158.75,46.04 158.75,54.93 v158.12,55.56
A12  (via drill 0.6)
  Top 0.254: v155.89,70.8 154.62,72.07 154.31,72.39 139.38,72.39 v138.43,73.34 | JP9.1 158.75,101.6 156.21,101.6 JP8.3 v140.97,102.87
  Bottom 0.254: U3.4 139.7,66.04 138.43,67.31 v138.43,73.34 138.43,76.2 139.7,77.47 U2.4 139.7,87.63 140.97,88.9 v140.97,102.87 | U15.18 162.56,45.09 160.02,47.62 160.02,66.67 v155.89,70.8
A13  (via drill 0.6)
  Top 0.254: JP11.1 158.75,95.25 156.21,95.25 JP10.3 153.67,96.52 151.13,93.98 v138.43,93.98 | U3.28 138.43,45.72 148.59,45.72 v150.5,43.81 | v148.59,33.02 161.29,33.02 U15.3
  Bottom 0.254: U3.28 137.16,54.61 138.43,55.88 138.43,66.04 137.16,67.31 U2.28 137.16,76.2 138.43,77.47 v138.43,93.98 | v150.5,43.81 150.5,34.92 v148.59,33.02
A14  (via drill 0.6)
  Top 0.254: v155.89,72.07 154.94,73.03 141.6,73.03 v140.97,73.66 | JP13.1 158.75,88.9 156.21,88.9 JP12.3 148.59,90.17 147.32,88.9 v143.51,88.9
  Bottom 0.254: U3.3 142.24,66.04 140.97,67.31 v140.97,73.66 140.97,76.2 142.24,77.47 U2.3 142.24,87.63 v143.51,88.9 | U15.16 167.64,40.96 160.66,47.94 160.66,67.31 v155.89,72.07
A15  (via drill 0.6)
  Top 0.254: v157.16,72.07 155.26,73.98 v144.78,73.98 142.88,73.98 141.29,75.56 112.08,75.56 110.81,76.84 84.45,76.84 v83.82,76.2
  Bottom 0.254: U3.31 144.78,54.61 146.05,55.88 146.05,66.04 144.78,67.31 U2.31 v144.78,73.98 | U15.5 167.64,34.29 168.91,35.56 168.91,40.64 161.29,48.26 161.29,67.95 v157.16,72.07 | v83.82,76.2 U5.15
A16  (via drill 0.6)
  Top 0.254: v157.16,73.34 155.57,74.93 144.78,74.93 144.46,75.25 v143.51,75.25 | v83.82,89.54 84.45,90.17 103.5,90.17 108.58,85.09 143.51,85.09 U2.2
  Bottom 0.254: U2.2 144.78,77.47 143.51,76.2 v143.51,75.25 143.51,67.31 144.78,66.04 U3.2 | U15.14 172.72,40.64 171.77,41.59 168.91,41.59 161.93,48.58 161.93,68.58 v157.16,73.34 | U5.6 v83.82,89.54
A17  (via drill 0.6)
  Top 0.254: v158.43,73.34 156.21,75.56 145.1,75.56 144.46,76.2 v142.24,76.2 112.39,76.2 111.12,77.47 79.38,77.47 v78.74,76.84
  Bottom 0.254: U3.30 142.24,54.61 143.51,55.88 143.51,66.04 142.24,67.31 U2.30 v142.24,76.2 | U15.7 172.72,34.29 173.99,35.56 173.99,40.64 172.09,42.54 168.91,42.54 162.56,48.89 162.56,69.22 v158.43,73.34 | v78.74,76.84 U5.13
A18  (via drill 0.6)
  Top 0.254: v158.43,74.61 156.53,76.52 v146.05,76.52 | U5.8 80.64,90.81 103.82,90.81 108.9,85.73 145.41,85.73 U2.1
  Bottom 0.254: U15.12 177.8,40.64 174.94,43.5 168.91,43.5 163.19,49.21 163.19,69.85 v158.43,74.61 | U3.1 147.32,66.04 146.05,67.31 v146.05,76.52 147.32,77.79 U2.1
A19  (via drill 0.6)
  Top 0.254: v159.7,74.61 156.84,77.47 127,77.47 126.36,76.84 112.71,76.84 111.44,78.11 v73.66,78.11 v62.87,78.11 | v39.37,17.78 44.45,17.78 U8.5
  Bottom 0.254: U15.9 177.8,34.29 179.07,35.56 179.07,40.64 175.26,44.45 168.91,44.45 163.83,49.53 163.83,70.48 v159.7,74.61 | v39.37,17.78 39.37,26.67 40.64,27.94 U7.3 40.64,34.29 39.37,35.56 39.37,54.61 v62.87,78.11 | v73.66,78.11 U5.11
BA0  (via drill 0.6)
  Top 0.254: v140.97,10.16 142.24,8.89 CE0.23
  Bottom 0.254: v140.97,10.16 140.97,11.43 133.35,19.05 133.35,27.94 135.89,30.48 135.89,34.29 134.62,35.56 U13.15
BA1
  Bottom 0.254: CE0.24 142.24,11.43 134.3,19.37 134.3,26.35 138.43,30.48 138.43,34.29 139.7,35.56 U13.13
BA2  (via drill 0.6)
  Top 0.254: CE0.25 144.78,8.89 v143.51,10.16
  Bottom 0.254: v143.51,10.16 143.51,11.43 135.25,19.68 135.25,26.04 139.7,30.48 U13.8
BA3
  Bottom 0.254: CE0.26 144.78,14.61 140.97,18.41 140.97,27.94 143.51,30.48 143.51,34.29 144.78,35.56 U13.11
BA4  (via drill 0.6)
  Top 0.254: CE0.27 v147.32,10.16
  Bottom 0.254: v147.32,10.16 147.32,13.97 U14.2
BA5
  Bottom 0.254: CE0.28 147.32,8.89 148.59,10.16 148.59,15.24 146.05,17.78 146.05,21.59 147.32,22.86 U14.17
BA6  (via drill 0.6)
  Top 0.254: CE0.29 v149.86,10.16
  Bottom 0.254: v149.86,10.16 149.86,16.51 U14.4
BA7
  Bottom 0.254: CE0.30 149.86,8.89 151.13,10.16 151.13,21.59 152.4,22.86 U14.15
BA8  (via drill 0.6)
  Top 0.254: CE0.31 v152.4,10.16
  Bottom 0.254: v152.4,10.16 U14.6
BA9
  Bottom 0.254: CE0.32 152.4,8.89 156.21,12.7 156.21,21.59 157.48,22.86 U14.13
BA10  (via drill 0.6)
  Top 0.254: CE0.33 v154.94,10.16
  Bottom 0.254: v154.94,10.16 157.48,12.7 U14.8
BA11
  Bottom 0.254: CE0.34 154.94,8.89 161.29,15.24 161.29,21.59 162.56,22.86 U14.11
BA12  (via drill 0.6)
  Top 0.254: v157.48,10.16 CE0.35
  Bottom 0.254: v157.48,10.16 165.1,17.78 165.1,26.67 U15.2
BA13
  Bottom 0.254: CE0.36 157.48,8.89 165.74,17.14 165.74,27.3 163.83,29.21 163.83,34.29 165.1,35.56 U15.17
BA14  (via drill 0.6)
  Top 0.254: CE0.37 v160.02,10.16
  Bottom 0.254: v160.02,10.16 166.37,16.51 166.37,27.62 165.1,28.89 U15.4
BA15
  Bottom 0.254: CE0.38 160.02,8.89 167,15.88 167,27.62 168.91,29.53 168.91,34.29 170.18,35.56 U15.15
BA16  (via drill 0.6)
  Top 0.254: CE0.39 v162.56,10.16
  Bottom 0.254: v162.56,10.16 167.64,15.24 167.64,27.3 170.18,29.85 U15.6
BA17
  Bottom 0.254: CE0.40 162.56,8.89 168.28,14.61 168.28,26.99 171.77,30.48 173.04,30.48 173.99,31.43 173.99,34.29 175.26,35.56 U15.13
BA18  (via drill 0.6)
  Top 0.254: CE0.41 v165.1,10.16
  Bottom 0.254: v165.1,10.16 168.91,13.97 168.91,26.67 172.09,29.85 173.35,29.85 U15.8
BA19  (via drill 0.6)
  Top 0.254: v173.04,28.89 174.62,30.48 v179.07,30.48
  Bottom 0.254: CE0.42 165.1,8.89 169.54,13.34 169.54,26.35 172.09,28.89 v173.04,28.89 | U15.11 180.34,35.56 179.07,34.29 v179.07,30.48
D0  (via drill 0.6)
  Top 0.254: v180.97,80.01 172.4,80.01 172.09,79.69 170.81,79.69 170.5,80.01 CF1.21 160.34,80.01 159.07,81.28 118.43,81.28 118.11,80.96 v116.84,80.96 | v116.84,57.15 109.86,57.15 107.95,59.05 v71.12,59.05 v67.31,59.05
  Bottom 0.254: U16.18 RN2.2 181.61,30.48 181.61,79.38 v180.97,80.01 | U1.11 116.84,99.06 115.57,97.79 115.57,88.9 116.84,87.63 U2.13 v116.84,80.96 116.84,77.47 115.57,76.2 115.57,67.31 116.84,66.04 U3.13 v116.84,57.15 | U4.11 v71.12,59.05 | v67.31,59.05 67.31,43.18 66.04,41.91 U9.18 66.04,35.56 64.77,34.29 64.77,27.94 66.04,26.67 U10.18
D1  (via drill 0.6)
  Top 0.254: v181.61,81.28 172.4,81.28 172.09,81.6 170.81,81.6 170.5,81.28 CF1.22 161.61,81.28 160.97,81.92 115.57,81.92 115.25,81.6 v114.3,81.6 | U3.14 112.08,60.01 v68.58,60.01 | U10.3 66.04,20.32 67.31,21.59 v67.31,25.4
  Bottom 0.254: U3.14 114.3,66.04 113.03,67.31 113.03,76.2 114.3,77.47 v114.3,81.6 U2.14 114.3,87.63 113.03,88.9 113.03,97.79 114.3,99.06 U1.12 | v181.61,81.28 182.25,80.65 182.25,29.85 RN2.3 U16.17 | U4.12 v68.58,60.01 68.58,54.61 69.85,53.34 69.85,36.83 66.04,33.02 U9.3 66.04,27.94 67.31,26.67 v67.31,25.4
D2  (via drill 0.6)
  Top 0.254: v182.25,82.55 CF1.23 113.03,82.55 U2.15 | U3.15 110.49,60.96 v72.39,60.96 67.31,60.96 U4.13
  Bottom 0.254: U3.15 111.76,66.04 110.49,67.31 110.49,76.2 111.76,77.47 U2.15 111.76,87.63 110.49,88.9 110.49,97.79 111.76,99.06 U1.13 | U16.16 RN2.4 182.88,31.75 182.88,81.92 v182.25,82.55 | v72.39,60.96 72.39,43.18 71.12,41.91 U9.16 71.12,35.56 69.85,34.29 69.85,27.94 71.12,26.67 U10.16
D3  (via drill 0.6)
  Top 0.254: v189.87,55.88 CF1.2 160.97,55.88 158.75,58.1 111.12,58.1 v110.49,58.74 | U3.17 107.95,45.72 64.77,45.72 U4.15 | v64.77,37.15 v72.39,37.15 | U10.5 71.12,20.32 72.39,21.59 v72.39,25.4
  Bottom 0.254: U3.17 109.22,54.61 110.49,55.88 v110.49,58.74 110.49,66.04 109.22,67.31 U2.17 109.22,76.2 110.49,77.47 110.49,87.63 109.22,88.9 U1.15 | U16.15 RN2.5 190.5,31.75 190.5,55.24 v189.87,55.88 | v64.77,37.15 64.77,41.91 63.5,43.18 U4.15 | v72.39,25.4 72.39,26.67 71.12,27.94 U9.5 71.12,34.29 72.39,35.56 v72.39,37.15
D4  (via drill 0.6)
  Top 0.254: v190.5,57.15 CF1.3 160.66,57.15 159.07,58.74 113.67,58.74 v113.03,59.37 | U3.18 109.86,45.09 77.47,45.09 77.15,44.77 v76.2,44.77 75.25,44.77 74.93,45.09 66.67,45.09 v66.04,44.45
  Bottom 0.254: U3.18 111.76,54.61 113.03,55.88 v113.03,59.37 113.03,66.04 111.76,67.31 U2.18 111.76,76.2 113.03,77.47 113.03,87.63 111.76,88.9 U1.16 | U16.14 RN2.6 191.13,29.85 191.13,56.52 v190.5,57.15 | v66.04,44.45 U4.16 | v76.2,44.77 U9.14 76.2,35.56 74.93,34.29 74.93,27.94 76.2,26.67 U10.14
D5  (via drill 0.6)
  Top 0.254: v191.13,58.42 CF1.4 160.34,58.42 159.38,59.37 116.2,59.37 v115.57,60.01 | U3.19 111.76,44.45 77.79,44.45 77.15,43.81 75.25,43.81 74.61,44.45 69.22,44.45 v68.58,43.81 | v67.31,38.1 v77.47,38.1 | U10.7 76.2,20.32 77.47,21.59 v77.47,25.4
  Bottom 0.254: U3.19 114.3,54.61 115.57,55.88 v115.57,60.01 115.57,66.04 114.3,67.31 U2.19 114.3,76.2 115.57,77.47 115.57,87.63 114.3,88.9 U1.17 | U16.13 RN2.7 191.77,30.48 191.77,57.78 v191.13,58.42 | U4.17 v68.58,43.81 68.58,43.18 67.31,41.91 v67.31,38.1 | v77.47,25.4 77.47,26.67 76.2,27.94 U9.7 76.2,34.29 77.47,35.56 v77.47,38.1
D6  (via drill 0.6)
  Top 0.254: v191.77,59.69 CF1.5 160.02,59.69 159.7,60.01 118.75,60.01 v118.11,60.64 | v71.12,43.18 77.47,43.18 77.79,43.5 v78.74,43.5 79.69,43.5 80.01,43.81 113.67,43.81 U3.20
  Bottom 0.254: U3.20 116.84,54.61 118.11,55.88 v118.11,60.64 118.11,66.04 116.84,67.31 U2.20 116.84,76.2 118.11,77.47 118.11,87.63 116.84,88.9 U1.18 | U16.12 RN2.8 192.41,32.38 192.41,59.05 v191.77,59.69 | U4.18 v71.12,43.18 | v78.74,43.5 81.28,40.96 U9.12 81.28,35.56 80.01,34.29 80.01,26.67 81.28,25.4 U10.12
D7  (via drill 0.6)
  Top 0.254: v192.41,60.96 CF1.6 v120.65,60.96 | v73.03,42.23 v82.55,42.23 83.5,43.18 115.57,43.18 U3.21 | U10.9 81.28,20.32 82.55,21.59 v82.55,22.54
  Bottom 0.254: U3.21 119.38,54.61 120.65,55.88 v120.65,60.96 120.65,66.04 119.38,67.31 U2.21 119.38,76.2 120.65,77.47 120.65,87.63 119.38,88.9 U1.19 | U16.11 RN2.9 193.04,34.29 193.04,60.32 v192.41,60.96 | U4.19 73.66,42.86 v73.03,42.23 | v82.55,22.54 82.55,25.4 81.28,26.67 U9.9 81.28,34.29 82.55,35.56 v82.55,42.23
GND  (via drill 0.5, 0.6, 0.8, 4.06 pad 6.35)
  Top 0.254: CF1.17 170.18,74.93 170.18,73.66 | 170.18,73.66 170.18,72.39 | 170.18,72.39 170.18,71.76 | 170.18,71.76 170.18,71.12 | 170.18,71.12 170.18,68.9 | 170.18,68.9 170.18,66.99 | 170.18,66.99 170.18,66.04 | 170.18,66.04 170.18,64.77 | 170.18,64.77 170.18,63.5 CF1.8 | CF1.15 170.18,72.39 | CF1.39 170.18,71.76 | CF1.14 170.18,71.12 | CF1.16 170.18,73.66 | 170.18,68.9 167.96,68.9 167.64,68.58 CF1.12 C17.2 | CF1.11 167.64,67.31 167.96,66.99 170.18,66.99 | CF1.10 170.18,66.04 | CF1.9 170.18,64.77
  Top 0.305: CF1.50 168.28,85.73 | 160.97,85.73 CF1.50 | CF1.50 164.59,87 | CF1.1 168.28,54.61 | CF1.1 164.59,53.34 | CF1.1 160.97,54.61
  Top 1.27: CE0.3 v116.84,9.21 v116.84,10.48 v116.84,11.75
  Bottom 0.406: 63.66,19.37 65.88,19.37 | 66.2,19.37 68.42,19.37 | 68.74,19.37 70.96,19.37 | 71.28,19.37 73.5,19.37 | 73.82,19.37 76.04,19.37 | 76.36,19.37 78.58,19.37 | 78.9,19.37 81.12,19.37 | 81.44,19.37 85.41,19.37 | C10.2 60.96,19.05 61.28,19.37 63.34,19.37
  Bottom 0.813: 63.34,19.37 63.66,19.37 | 65.88,19.37 66.2,19.37 | 68.42,19.37 68.74,19.37 | 70.96,19.37 71.28,19.37 | 73.5,19.37 73.82,19.37 | 76.04,19.37 76.36,19.37 | 78.58,19.37 78.9,19.37 | 81.12,19.37 81.44,19.37
  Bottom 1.27: v116.84,11.75 v116.84,10.48 v116.84,9.21 CE0.3
  Bottom 1.524: CE0.62 v190.5,10.48 v190.5,11.43
  other vias: 5.08,104.14 5.08,12.7 198.12,12.7 198.12,104.14 107.95,48.58 108.27,75.56 109.22,93.98 187.01,49.21 185.74,47.94 188.28,47.94 187.01,91.12 188.28,92.39 185.74,92.39 32.07,55.88 32.07,53.34 154.94,64.77 172.09,70.17 172.09,77.79 172.09,62.55 140.97,16.51 162.24,16.51 171.13,16.51 165.42,53.34 165.42,87 162.24,87 106.36,57.47 92.39,57.47 96.84,57.47 74.93,56.83 180.34,10.16 179.07,24.77 148.91,40.96 106.05,96.52 96.52,81.28 105.41,66.04 64.77,64.77 76.2,80.01 196.85,35.88 196.85,48.58 196.85,61.28 177.8,86.68 184.15,73.98 184.15,107.31 171.45,107.31 158.75,107.31 146.05,107.31 133.35,107.31 120.65,107.31 107.95,107.31 57.78,81.6 45.09,68.9 27.3,64.45 6.99,47.31 103.5,9.84 90.81,9.84 78.11,9.84 65.41,9.84 52.7,9.84 40.01,9.84 27.3,9.84 20.95,16.19 14.61,22.54 8.26,28.89 51.44,75.25 64.14,87.95 69.22,75.88 46.04,35.56 57.47,25.4 90.49,31.75 85.09,101.6 196.85,73.98 196.85,86.68 59.69,45.4 57.15,39.05
  pour Top: 0,109.22 9.02,109.22 9.02,103.51 51.12,103.51 56.83,109.22 203.2,109.22 203.2,7.62 192.72,7.62 192.72,8.57 112.08,8.57 112.08,7.62 0,7.62
  pour Bottom: 0,109.22 203.2,109.22 203.2,7.62 192.72,7.62 192.72,8.57 112.08,8.57 112.08,7.62 0,7.62
ID0  (via drill 0.5)
  Top 0.254: U10.2 63.5,19.05 v64.77,20.32
  Bottom 0.254: v64.77,20.32 63.66,20.32
  Bottom 0.61: 63.66,20.32 63.34,20.32
ID1  (via drill 0.5)
  Top 0.254: U10.17 68.58,21.59 v67.31,20.32
  Bottom 0.254: v67.31,20.32 66.2,20.32
  Bottom 0.61: 66.2,20.32 65.88,20.32
ID2  (via drill 0.5)
  Top 0.254: U10.4 68.58,19.05 v69.85,20.32
  Bottom 0.254: v69.85,20.32 68.74,20.32
  Bottom 0.61: 68.74,20.32 68.42,20.32
ID3  (via drill 0.5)
  Top 0.254: U10.15 73.66,21.59 v72.39,20.32
  Bottom 0.254: v72.39,20.32 71.28,20.32
  Bottom 0.61: 71.28,20.32 70.96,20.32
ID4  (via drill 0.5)
  Top 0.254: U10.6 73.66,19.05 v74.93,20.32
  Bottom 0.254: v74.93,20.32 73.82,20.32
  Bottom 0.61: 73.82,20.32 73.5,20.32
ID5  (via drill 0.5)
  Top 0.254: U10.13 78.74,21.59 v77.47,20.32
  Bottom 0.254: v77.47,20.32 76.36,20.32
  Bottom 0.61: 76.36,20.32 76.04,20.32
ID6  (via drill 0.5)
  Top 0.254: U10.8 78.74,19.05 v80.01,20.32
  Bottom 0.254: v80.01,20.32 78.9,20.32
  Bottom 0.61: 78.9,20.32 78.58,20.32
ID7  (via drill 0.5)
  Top 0.254: U10.11 83.82,21.59 v82.55,20.32
  Bottom 0.254: v82.55,20.32 81.44,20.32
  Bottom 0.61: 81.44,20.32 81.12,20.32
INT_CF
  Top 0.254: CF1.37 154.62,69.22 153.99,69.85 147.64,69.85 146.69,70.8 108.58,70.8 105.73,73.66 97.79,73.66 JP5.1
N$1  (via drill 0.6)
  Top 0.254: CF1.45 169.54,79.38 v170.18,78.74 | v173.99,93.98 177.8,93.98 180.34,96.52 185.42,96.52 187.96,99.06 195.58,99.06 196.85,97.79 D2.C
  Bottom 0.254: v170.18,78.74 170.18,83.82 173.99,87.63 v173.99,93.98
N$2
  Top 0.254: R11.1 194.31,97.79 196.85,95.25 D2.A
N$3  (via drill 0.6)
  Top 0.254: CF1.42 160.97,75.56 157.8,78.74 126.36,78.74 125.73,78.11 113.35,78.11 112.08,79.38 93.34,79.38 v92.71,80.01
  Bottom 0.254: JP4.2 91.44,78.74 v92.71,80.01
N$4  (via drill 0.6)
  Top 0.254: v38.1,21.59 38.73,22.23 50.8,22.23 52.7,24.13 v54.61,24.13 | v71.44,82.55 v92.71,82.55
  Bottom 0.254: U8.2 v38.1,21.59 | v54.61,24.13 54.61,56.83 71.44,73.66 v71.44,82.55 | v92.71,82.55 92.71,87.63 96.52,91.44 U5.1
N$5
  Bottom 0.254: U4.3 91.44,64.77 Y1.1
N$6
  Bottom 0.254: U4.2 Y1.2
N$7
  Top 0.406: U4.24 84.45,48.89 69.22,48.89 63.5,54.61 BT1.+
N$8
  Bottom 0.254: R2.2 18.41,46.35 Q1.2
N$9
  Top 0.406: C2.1 U2.32 146.05,69.85 107.95,69.85 105.41,72.39 JP7.2
N$10
  Top 0.406: R1.2 Q1.3
N$11
  Bottom 0.254: U4.23 77.47,53.34 77.47,67.31 JP1.2
N$12  (via drill 0.6)
  Top 0.254: JP10.2 156.21,97.79 153.67,97.79 151.13,95.25 137.79,95.25 v137.16,94.62
  Bottom 0.254: v137.16,94.62 U1.26
N$13
  Top 0.406: R1.1 16.51,53.34 D1.A
N$14
  Top 0.254: U4.4 87.63,63.5 29.21,63.5 R2.1
N$16
  Top 0.254: JP8.2 156.21,104.14 140.97,104.14 U1.2
N$17  (via drill 0.6)
  Top 0.254: v144.15,91.44 156.21,91.44 JP12.2
  Bottom 0.254: U1.1 142.24,99.06 144.15,97.16 v144.15,91.44
N$18
  Top 0.254: JP13.2 156.21,86.36 109.22,86.36 104.14,91.44 90.17,91.44 U5.4
N$19
  Bottom 0.254: U8.9 48.26,26.67 49.53,27.94 49.53,34.29 50.8,35.56 U7.8
N$20
  Top 0.254: U6.1 16.51,25.4 17.46,24.45 33.97,24.45 34.92,25.4 39.37,25.4 U8.12
N$21  (via drill 0.6)
  Top 0.254: v42.55,20.96 43.18,21.59 52.39,21.59 v53.66,22.86 | v69.85,73.66 95.25,73.66 JP5.2
  Bottom 0.254: v42.55,20.96 40.64,19.05 U8.3 40.64,15.24 R7.2 | v53.66,22.86 53.66,57.47 v69.85,73.66
N$22  (via drill 0.6)
  Top 0.254: JP11.2 156.21,92.71 v148.59,92.71 | v151.13,87.63 150.5,87 109.54,87 106.36,90.17 106.36,90.81 v105.73,91.44 | v103.19,87.31 102.23,86.36 90.17,86.36 U5.17
  Bottom 0.254: v148.59,92.71 148.59,90.17 v151.13,87.63 | v105.73,91.44 103.19,88.9 v103.19,87.31
N$23
  Top 0.254: JP9.2 156.21,99.06 153.67,99.06 151.13,96.52 107.95,96.52 106.05,94.62 98.11,94.62 97.47,93.98 95.25,93.98 U5.2
N$24  (via drill 0.6)
  Top 0.406: C4.1 U4.28 | v96.52,41.91 v123.19,41.91
  Bottom 0.406: U4.28 v96.52,41.91 | v123.19,41.91 123.19,30.16 124.46,28.89 124.46,16.51 JP14.2
N$25  (via drill 0.6)
  Top 0.254: CF1.46 v171.45,80.65 | v174.94,93.03 181.29,93.03 183.51,95.25 R12.1
  Bottom 0.254: v171.45,80.65 171.45,84.14 174.94,87.63 v174.94,93.03
N$27  (via drill 0.6)
  Top 0.254: v46.99,27.62 45.4,27.62 43.5,29.53 v35.56,29.53
  Bottom 0.254: U8.6 48.26,19.05 46.99,20.32 v46.99,27.62 | v35.56,29.53 U7.1
N$31
  Bottom 0.254: U4.6 83.82,63.5 JP2.1
N$32  (via drill 0.6)
  Top 0.254: v15.24,24.13 24.13,15.24 42.55,15.24 43.81,13.97 113.03,13.97 116.84,17.78 171.45,17.78 173.99,20.32 v176.53,20.32
  Bottom 0.254: U6.3 v15.24,24.13 | v176.53,20.32 176.53,22.86 177.8,24.13 U16.19
N$33
  Bottom 0.254: CE0.50 175.26,8.89 179.07,12.7 189.23,12.7 U16.9
N$34  (via drill 0.6)
  Top 0.254: CE0.49 v175.26,10.16
  Bottom 0.254: v175.26,10.16 178.44,13.34 187.32,13.34 U16.8
N$35
  Bottom 0.254: CE0.48 172.72,8.89 177.8,13.97 185.42,13.97 U16.7
N$36  (via drill 0.6)
  Top 0.254: v172.72,10.16 CE0.47
  Bottom 0.254: U16.6 183.51,14.61 177.16,14.61 v172.72,10.16
N$37
  Bottom 0.254: U16.5 181.61,15.24 176.53,15.24 170.18,8.89 CE0.46
N$38  (via drill 0.6)
  Top 0.254: CE0.45 v170.18,10.16
  Bottom 0.254: v170.18,10.16 175.9,15.88 179.71,15.88 U16.4
N$39
  Bottom 0.254: CE0.44 167.64,8.89 175.26,16.51 177.8,16.51 U16.3
N$40  (via drill 0.6)
  Top 0.254: v167.64,10.16 CE0.43
  Bottom 0.254: U16.2 175.9,17.14 174.62,17.14 v167.64,10.16
N$108
  Top 0.254: JP8.1 163.83,102.87 165.1,104.14 170.18,104.14 171.45,102.87 S2.3 176.53,102.87 179.07,105.41 R8.2
N$109
  Top 0.254: JP10.1 165.1,101.6 170.18,101.6 171.45,100.33 S2.2 176.53,100.33 179.07,102.87 R9.2
N$110
  Top 0.254: JP12.1 162.56,92.71 162.56,96.52 165.1,99.06 170.18,99.06 171.45,97.79 S2.1 176.53,97.79 179.07,100.33 R10.2
S$1
  pour Top: 10.87,104.53 11.86,104.53 12.97,105.56 13.53,104.53 14.58,104.53 13.63,106.16 15.41,107.79 14.43,107.79 13.3,106.75 12.74,107.79 11.7,107.79 12.64,106.13
  pour Top: 21.56,107.79 22.44,107.79 21.6,104.53 20.72,104.53
  pour Top: 26.95,107.79 26.78,107.1 23.79,107.1 23.31,105.22 26.28,105.22 26.12,104.53 22.83,104.53 arc-47 22.56,104.64 arc-36 22.42,104.96 arc-17 22.43,105.22 arc-5 22.46,105.37 22.86,106.95 arc-33 23.23,107.55 arc-31 23.61,107.78 arc-13 23.75,107.79
  pour Top: 27.6,107.79 28.3,107.1 28.12,106.39 30.23,106.39 30.41,107.1 28.32,107.1 27.62,107.79 30.75,107.79 arc-55 31.17,107.58 arc-31 31.28,107.32 arc-18 31.25,107 31.14,106.58 arc-18 31.06,106.4 arc-18 30.75,106 arc-19 30.44,105.8 arc-14 30.09,105.74 30.52,104.53 29.65,104.53 29.21,105.75 27.94,105.75 27.62,104.53 26.75,104.53
  pour Top: 15.17,104.53 16.01,107.79 20.29,107.79 arc-50 20.62,107.66 arc-37 20.75,107.37 arc-17 20.72,106.99 20.08,104.53 19.21,104.53 19.88,107.1 18.74,107.1 18.07,104.53 17.19,104.53 17.86,107.1 16.72,107.1 16.05,104.53
  pour Top: 32.83,107.1 34.92,107.1 34.42,105.22 32.3,105.22 32.8,107.1 32.85,107.79 32.75,107.79 arc33 32.36,107.65 arc19 32.07,107.33 arc18 31.89,106.95 31.47,105.35 arc9 31.45,105.25 arc9 31.44,105.01 arc22 31.48,104.8 arc36 31.61,104.62 arc17 31.73,104.55 arc13 31.87,104.53 34.45,104.53 arc18 34.66,104.55 arc16 34.84,104.65 arc14 35.08,104.87 arc26 35.33,105.34 35.77,107.01 arc17 35.79,107.29 arc19 35.75,107.51 arc66 35.37,107.79 32.88,107.79
SW12
  Top 0.254: JP9.3 153.67,100.33 151.13,97.79 S1.8
  Bottom 0.254: S1.8 RN1.2 U5.3
SW13  (via drill 0.6)
  Top 0.254: v150.81,99.06 92.71,99.06 S1.7
  Bottom 0.254: S1.7 RN1.3 90.17,93.98 90.17,90.17 91.44,88.9 U5.18 | JP11.3 150.81,98.11 v150.81,99.06
SW14  (via drill 0.6)
  Top 0.254: v149.22,100.33 91.44,100.33 S1.6
  Bottom 0.254: S1.6 RN1.4 U5.5 | JP13.3 149.86,92.71 149.86,99.7 v149.22,100.33
SW15
  Bottom 0.254: S1.5 RN1.5 85.09,93.98 85.09,90.17 86.36,88.9 U5.16
SW16
  Bottom 0.254: S1.4 RN1.6 U5.7
SW17
  Bottom 0.254: S1.3 RN1.7 80.01,93.98 80.01,90.17 81.28,88.9 U5.14
SW18
  Bottom 0.254: S1.2 RN1.8 U5.9
SW19
  Bottom 0.254: S1.1 RN1.9 74.93,93.98 74.93,90.17 76.2,88.9 U5.12
VBAT
  Bottom 0.406: JP7.3 102.87,73.66 102.87,68.58 U4.1
VCC  (via drill 0.6, 0.8)
  Top 0.254: CF1.36 v169.23,67.95 | CF1.32 167.64,62.86 167.96,62.55 v169.23,62.55 | CF1.44 v168.28,78.11 | v107.95,36.83 C13.1 | U6.13 12.7,36.83 | U6.12 15.24,36.83 | U6.10 20.32,36.83 | U6.9 22.86,36.83 | U8.14 36.83,22.86 41.91,22.86 U8.11 | U7.9 46.99,38.1 36.83,38.1 U7.14 33.02,41.91 R3.1 | C17.1 154.94,69.85 CF1.13 | U9.6 74.93,33.02 77.47,33.02 U9.8 | U9.13 80.01,38.1 83.82,38.1 | U9.11 83.82,38.1 | 83.82,38.1 88.58,38.1 C11.1 | U6.4 U6.5
  Top 0.305: CF1.38 167.64,70.48 167.96,70.17 167.64,69.85 CF1.13
  Top 0.61: 167.96,70.17 v169.23,70.17 | RN2.1 U16.20 | S1.9 S1.10 S1.11 S1.12 S1.13 S1.14 S1.15 S1.16
  Top 0.813: C1.1 U1.28 U1.27 | S2.6 170.18,95.25 176.53,95.25 179.07,97.79 R11.2 | 139.7,24.13 C14.1 C19.+ | 139.7,24.13 C16.1 173.99,24.13 175.26,25.4 U16.20 | U3.32 C3.1 | U14.20 139.7,24.13 | U5.20 C5.1 | JP7.1 108.27,65.72 v149.54,65.72 v150.5,65.72
  Top 1.016: C13.1 v121.92,36.83 | v121.92,36.83 125.73,36.83 | 125.73,36.83 147.32,36.83 | 147.32,36.83 154.94,36.83 U15.20 C15.1 157.48,43.18 158.75,44.45 171.77,44.45 v173.35,46.04 v173.99,46.67 | U13.20 v121.92,36.83 | v147.32,38.73 v147.32,37.78 147.32,36.83 | v118.43,15.56 v117.47,15.56 113.67,11.75 v88.27,11.75 v55.56,11.75 v33.66,11.75 | C11.1 91.44,36.83 U11.16 | U12.16 91.44,21.59 C12.1 | C6.1 10.16,36.83 | 10.16,36.83 12.7,36.83 15.24,36.83 20.32,36.83 22.86,36.83 C7.1 | U6.14 10.16,36.83 | v125.73,37.78 125.73,36.83 | C19.+ v120.33,24.13
  Top 1.27: v119.38,11.75 v119.38,10.48 v119.38,9.21 CE0.6
  Bottom 0.254: U11.6 106.68,34.29 107.95,35.56 v107.95,36.83 | U13.2 124.46,36.51 v125.73,37.78 | R4.2 55.88,38.1 C9.1 | U9.8 U9.13 | U6.5 U6.10
  Bottom 0.406: 63.66,21.27 65.88,21.27 | 66.2,21.27 68.42,21.27 | 68.74,21.27 70.96,21.27 | 71.28,21.27 73.5,21.27 | 73.82,21.27 76.04,21.27 | 76.36,21.27 78.58,21.27 | 78.9,21.27 81.12,21.27 | 63.34,21.27 61.28,21.27 60.96,21.59 59.05,21.59 | Q1.1 10.16,43.18 U6.14
  Bottom 0.61: 101.6,85.09 101.6,97.79 S1.9 | JP14.3 119.38,16.51
  Bottom 0.813: 148.91,66.04 148.91,55.88 147.32,54.29 U3.32 v147.32,38.73 v147.32,37.78 | 148.91,66.04 148.91,76.52 149.86,77.47 C18.1 146.05,87.63 C1.1 | S2.6 S2.5 S2.4 | C5.1 101.6,85.09 106.05,80.65 106.05,71.76 JP7.1 | v150.5,65.72 v149.54,65.72 149.22,65.72 148.91,66.04 | 63.34,21.27 63.66,21.27 | 65.88,21.27 66.2,21.27 | 68.42,21.27 68.74,21.27 | 70.96,21.27 71.28,21.27 | 73.5,21.27 73.82,21.27 | 76.04,21.27 76.36,21.27 | 78.58,21.27 78.9,21.27 | 81.12,21.27 81.44,21.27 | R11.2 R12.2
  Bottom 1.016: S2.6 163.83,93.98 163.83,82.55 v168.28,78.11 168.28,71.12 v169.23,70.17 v169.23,67.95 v169.23,62.55 173.99,57.78 v173.99,46.67 v173.35,46.04 | C15.1 U15.20 | 119.38,15.56 v118.43,15.56 v117.47,15.56 | 59.05,24.13 59.05,36.83 | v33.66,11.75 33.66,21.59 | 33.66,21.59 33.66,24.13 | 33.66,24.13 33.66,26.67 | 33.66,26.67 33.66,29.21 | 33.66,29.21 33.66,36.83 | v88.27,11.75 88.27,21.59 | 88.27,21.59 88.27,35.24 C11.1 | U10.20 59.05,24.13 | C9.1 59.05,36.83 | 59.05,36.83 59.05,37.46 U9.20 | U8.14 33.66,24.13 | C8.1 33.66,21.59 | C7.1 33.66,36.83 | 33.66,36.83 33.66,37.46 U7.14 | C12.1 88.27,21.59 | R5.1 33.66,29.21 | R6.1 33.66,26.67 | v55.56,11.75 55.56,20 C10.1 59.05,21.59 59.05,24.13 | 119.38,24.13 v120.33,24.13 C19.+
  Bottom 1.27: CE0.6 v119.38,9.21 v119.38,10.48 v119.38,11.75 119.38,15.56 119.38,16.51 119.38,24.13 119.38,32.07 121.92,34.61 v121.92,36.83 U13.20

## Text on the board
Top: XMICRO-MEMORY | V1 1802
tPlace: ROM BASE ADDRESS | BUS | SW | 1 | 0 | A12 | 1 | A12 | ROM PAGE | 0 | A19 | A12 | A14 | A13 | A14 | ROM / SIZE | CHRIS WEIR 2018
bPlace: CARD ID | 1 | 0 | 0 | 1 | 2 | 3 | 4 | 5 | 6 | 7
tNames: WATCHDOG
tDocu: Edge of case